# Altium PCB RPi Motor Driver Rev 0.2.PcbDoc
Units mm, origin at the board's own origin, x right, y up, seen from the top; angles counter-clockwise.
Board outline 65.25 x 56.75 mm, 2 copper layers (Top, Bottom); 42 components, 51 nets, 197 pads, 38 vias.
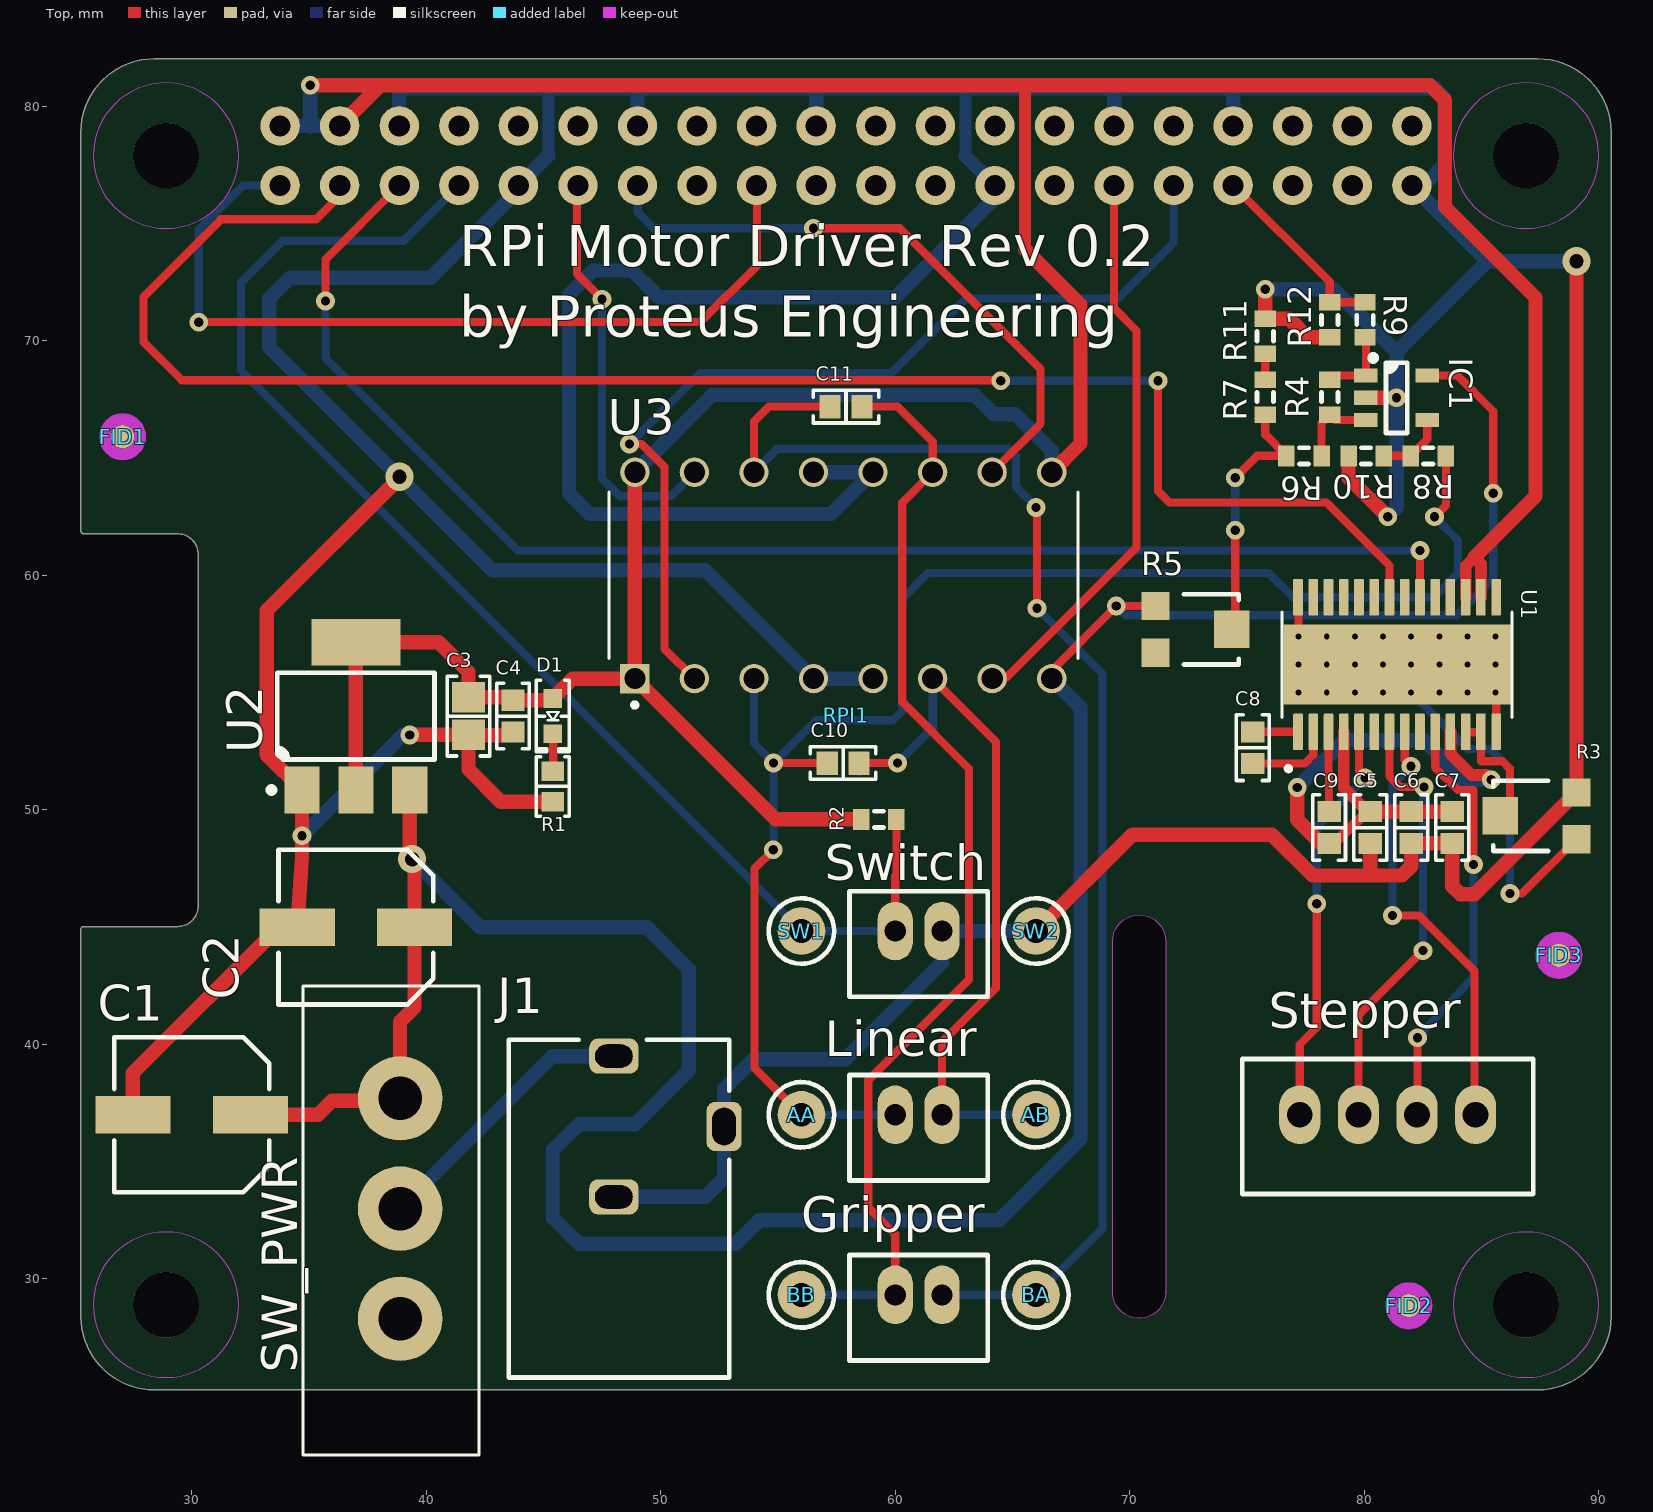
[diagram p0: Top view]
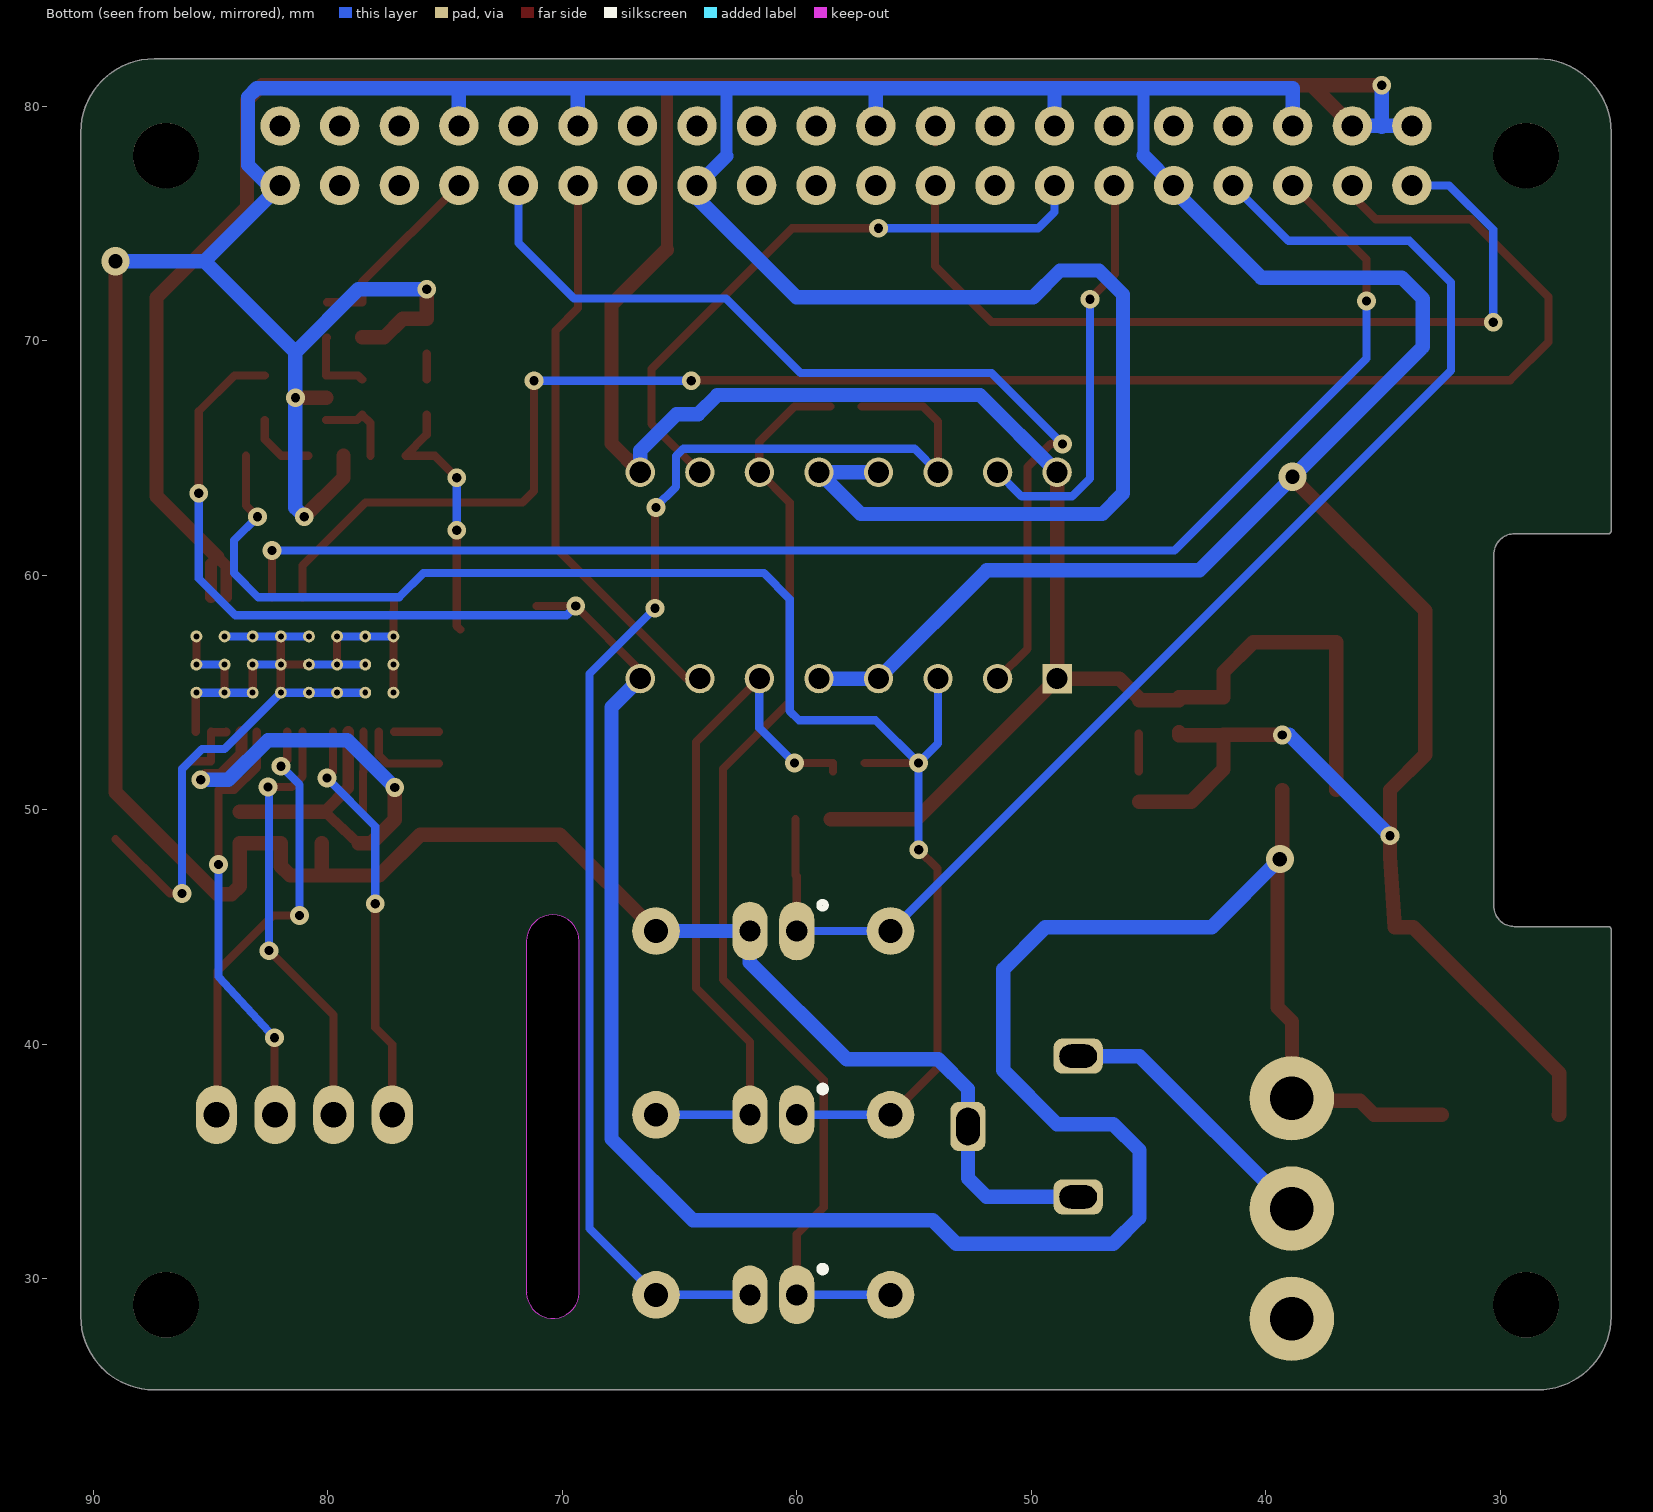
[diagram p1: Bottom view, seen from below]
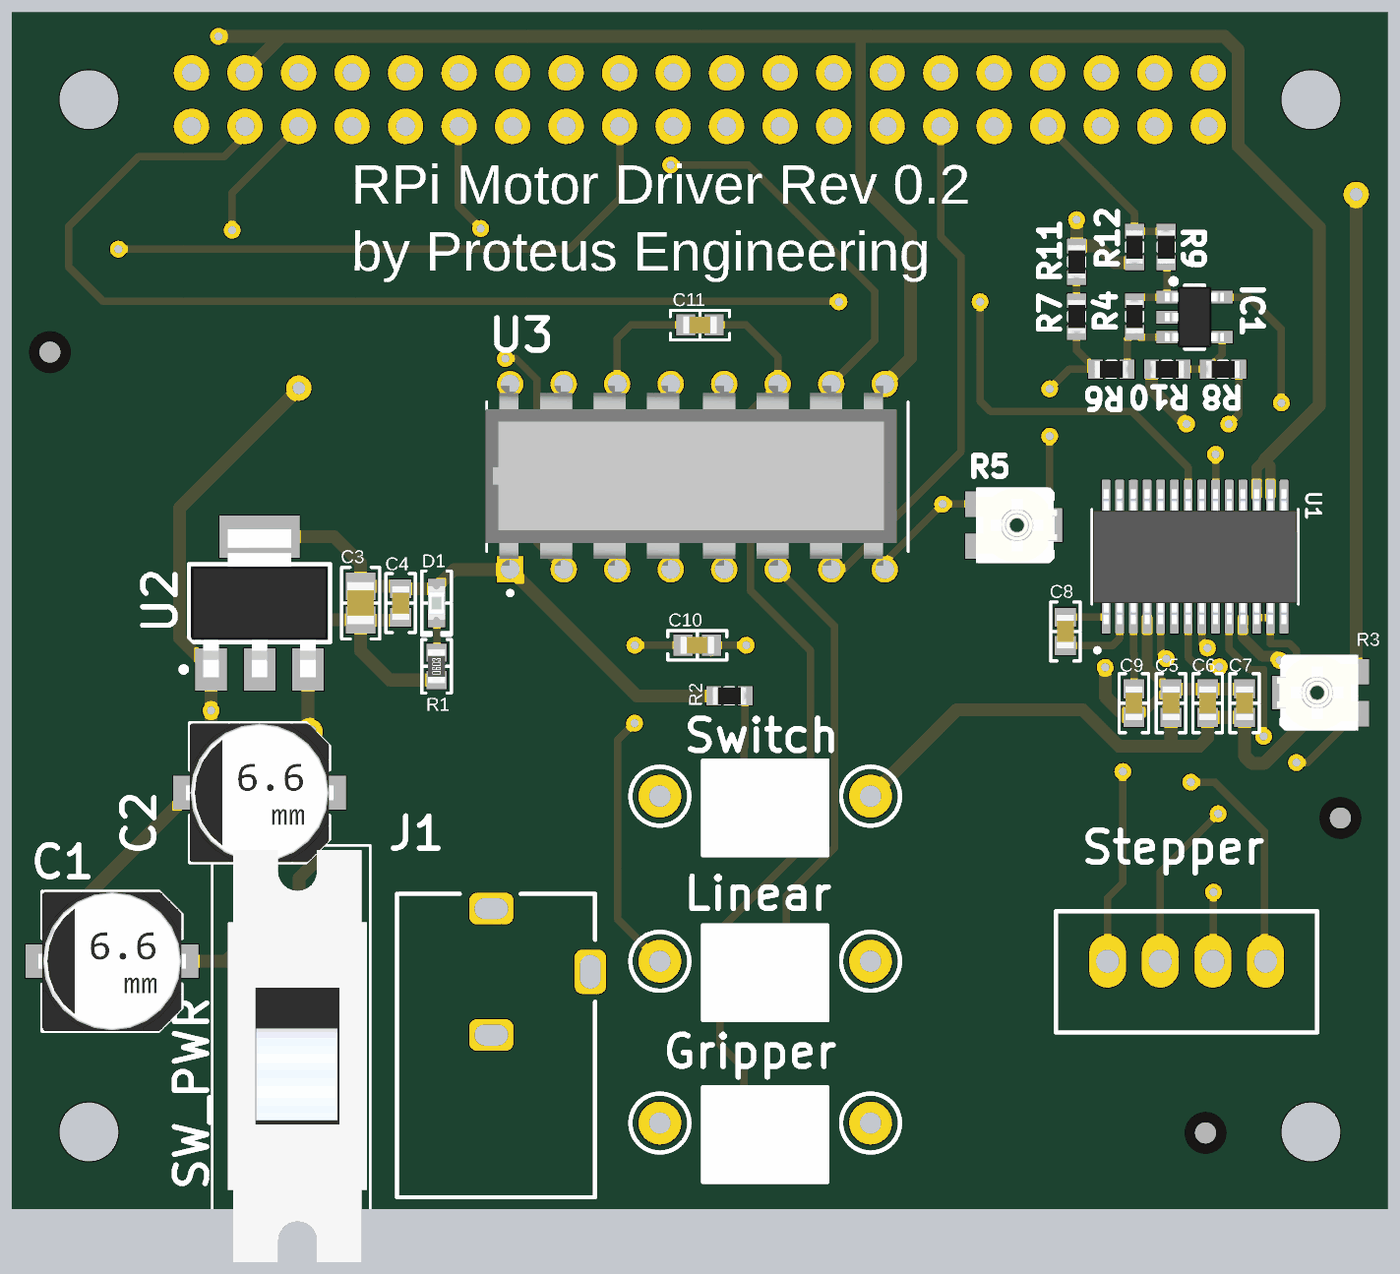
[diagram p2: 3D render of the assembled board from above, using the file's embedded part models]

## Layer stack, top to bottom
Top Solder: solder mask 0.0102, Solder Resist, Dk 3.5
Top: signal copper 0.035
Dielectric 1: dielectric 0.32, FR-4, Dk 4.8
Bottom: signal copper 0.035
Bottom Solder: solder mask 0.0102, Solder Resist, Dk 3.5

## Board outline
25.273,28.4 25.273,44.9 cw(c25.4,44.9) 25.401,45.027 29.4,45.027 ccw(c29.4,45.9) 30.273,45.9 30.273,60.9 ccw(c29.4,60.9) 29.4,61.773 25.4,61.773 cw(c25.4,61.9) 25.273,61.9 25.273,78.9 cw(c28.4,78.9) 28.4,82.027 87.4,82.027 cw(c87.4,78.9) 90.528,78.9 90.528,28.4 cw(c87.4,28.4) 87.4,25.273 28.4,25.273 cw(c28.4,28.4)
cut-out: 69.277,29.432 cw(c69.4,29.464) 69.273,29.464 69.273,44.4 cw(c70.4,44.4) 71.527,44.4 71.527,29.464 cw(c71.4,29.464) 71.523,29.432 cw(c71.4,29.4) 71.527,29.4 cw(c71.4,29.4) 71.527,29.394 cw(c70.4,29.449) 69.273,29.394 cw(c69.4,29.4)

## Design rules (kind name [scope] priority, off if disabled: settings)
Clearance "Clearance (Same Net)" [All] p1: gap=0.203 ignorepadtopadclearanceinfootprint=FALSE
Clearance [All] p2: gap=0.152 ignorepadtopadclearanceinfootprint=FALSE
ComponentClearance [All] p1 off: gap=0.254 collisioncheckmode=3 verticalgap=0.254 showdistances=FALSE
HoleSize [All] p1: absolutevalues=TRUE maxlimit=2540 minlimit=0.254 maxpercent=80.000 minpercent=20.000
HoleToHoleClearance mdDrill [All] p1: gap=0.203 allowstackedmicrovias=TRUE
PasteMaskExpansion Expansion_SMDPaste_OFF [InPadClass('SMDPaste_OFF')] p1: expansion=0
PasteMaskExpansion mlMinCreamFrame [All] p2: expansion=0
PolygonConnect ThermalVias [IsVia] p1: connectstyle=Direct reliefconductorwidth=0.254 reliefentries=4 polygonreliefangle="90 Angle" airgapwidth=0.254
PolygonConnect [All] p2: connectstyle=Relief reliefconductorwidth=0.254 reliefentries=4 polygonreliefangle="90 Angle" airgapwidth=0.254
RoutingVias [All] p1: holewidth=0.394 width=0.8 viastyle="Through Hole" minholewidth=0.394 minwidth=0.8 maxholewidth=2.54 maxwidth=2.54
SolderMaskExpansion mlMinStopFrame [All] p1: expansion=0.051
Width [All] p1: maxlimit=0.7 minlimit=0.35 preferedwidth=0.35
26 further rules are at their usual default settings.

## Classes and differential pairs
pad class SMDPaste_OFF: FID1-1 FID2-1

## Components (designator, comment, footprint, x,y, rotation, side; value= is the part's Value field where it differs from the comment)
AA "TH_Testpoint_40mil" TH_Testpoint_40mil 56,37 r0 top
AB "TH_Testpoint_40mil" TH_Testpoint_40mil 66,37 r0 top
BA "TH_Testpoint_40mil" TH_Testpoint_40mil 66,29.322 r0 top
BB "TH_Testpoint_40mil" TH_Testpoint_40mil 56,29.322 r0 top
C1 "47µF" "CAP ALSMD 6.6MM H6.1MM" 30,37 r180 top
C2 "47µF" "CAP ALSMD 6.6MM H6.1MM" 37,45 r180 top
C3 "10µF" "CAP 0805_2012" 41.8,54 r90 top
C4 "0.1µF" "CAP 0603_1608" 43.7,54 r90 top
C5 "4.7µF" "CAP 0603_1608" 80.26,49.25 r90 top
C6 "0.1µF" "CAP 0603_1608" 82,49.25 r90 top
C7 "0.1µF" "CAP 0603_1608" 83.753,49.25 r90 top
C8 "0.01µF" "CAP 0603_1608" 75.25,52.655 r90 top
C9 "0.1µF" "CAP 0603_1608" 78.5,49.25 r90 top
C10 "0.1µF" "CAP 0603_1608" 57.775,52 r180 top
C11 "0.1µF" "CAP 0603_1608" 57.9,67.2 r180 top
D1 "Green" "LED 0603_1608 GREEN" 45.4,54 r270 top
FID1 "FIDUCIAL\"\"" FIDUCIAL_1MM 27.051,65.913 r0 top
FID2 "FIDUCIAL\"\"" FIDUCIAL_1MM 81.9,28.853 r0 top
FID3 "FIDUCIAL\"\"" FIDUCIAL_1MM 88.3,43.8 r0 top
Gripper "B2B-PH-K-S(LF)(SN)" "JST B2B-PH-K" 61,29.322 r0 top
IC1 "AD8615AUJZ-REEL" "ANALOG TSOT-23-5 UJ-5" 81.38,67.575 r0 top
Linear "B2B-PH-K-S(LF)(SN)" "JST B2B-PH-K" 61,37 r0 top
R1 "100 Ohms" "RES 0603_1608" 45.4,51 r90 top
R2 "Resistor 0603" 0603R 59.3,49.6 r180 top value=100k
R3 "10 kOhms" "POT BOURNS TRIMPOT TC33" 87.25,49.75 r90 top
R4 "Resistor 0603" 0603R 78.53,67.6 r270 top value=50k
R5 "200 Ohms" "POT BOURNS TRIMPOT TC33" 72.9,57.7 r270 top
R6 "Resistor 0603" 0603R 77.43,65.1 r180 top value=1k
R7 "Resistor 0603" 0603R 75.78,67.6 r90 top value=200
R8 "Resistor 0603" 0603R 82.73,65.1 r0 top value=1k
R9 "Resistor 0603" 0603R 80.03,70.9 r270 top value=470k
R10 "Resistor 0603" 0603R 80.08,65.1 r0 top value=50k
R11 "Resistor 0603" 0603R 75.78,70.2 r90 top value=470
R12 "Resistor 0603" 0603R 78.53,70.9 r90 top value=200k
RPI1 "RASPBERRYPI_BPLUS_HATSLOTS" PI_HAT_SLOTS 25.4,25.4 r0 top
SW1 "TH_Testpoint_40mil" TH_Testpoint_40mil 56,44.835 r0 top
SW2 "TH_Testpoint_40mil" TH_Testpoint_40mil 66,44.835 r0 top
SW_PWR "48ASSP3S1M2QBT" "SWITCH SLIDE SPDT 5A 125V" 36,33 r270 top
Switch "B2B-PH-K-S(LF)(SN)" "JST B2B-PH-K" 61,44.835 r0 top
U1 "DRV8825PWP" SOP65P640X120-29N 81.4,56.2 r90 top
U2 "NCP1117ST50T3G" "ON SEMI SOT-223 ST(318H)" 37,54 r90 top
U3 "L293D" DIP880W50P254L2000H510Q16 57.785,60 r90 top

## Footprints (in the part's own frame and the unit in brackets; to place one, negate y for a bottom-side part, rotate by r counter-clockwise, add the part's x,y. Pads: shape width x height; smd on the part's side, far side on the other; paste and mask are expansions set on the pad)
0603R [mm] "Resistor"
  rect 0.7x0.9 smd: 1(-0.75,0) 2(0.75,0)
  silkscreen extent -0.2,-0.35 0.2,0.35, body extent -0.8,-0.4 0.8,0.4, height 0.45
"ANALOG TSOT-23-5 UJ-5" [mm] "SOT23, 5-Leads, Body 2.90x1.60mm, Pitch 0.95mm, IPC Medium Density"
  rect 1x0.6 smd: 1(-1.31,0.95) 2(-1.31,0) 3(-1.31,-0.95) 4(1.31,-0.95) 5(1.31,0.95)
  silkscreen extent -1.12,-1.5 0.45,1.82, body extent -1.4,-1.45 1.4,1.45, height 1
"CAP 0603_1608" [mm] "Chip Capacitor, 2-Leads, Body 1.60x0.80mm, IPC Medium Density"
  rect 0.9x1 smd: 1(-0.675,0) 2(0.675,0)
  silkscreen extent -1.4,-0.7 1.4,0.7, body extent -0.8,-0.41 0.8,0.41, height 0.82
"CAP 0805_2012" [mm] "Chip Capacitor, 2-Leads, Body 2.00x1.20mm, IPC Medium Density"
  rect 1.3x1.4 smd: 1(-0.8,0) 2(0.8,0)
  silkscreen extent -1.7,-0.9 1.7,0.9, body extent -1,-0.64 1,0.64, height 1.26
"CAP ALSMD 6.6MM H6.1MM" [mm] "Aluminum Electrolytic Capacitor, Body 6.60x6.60x6.10mm, IPC Low Density"
  rect 3.2x1.6 smd: 1(-2.5,0) 2(2.5,0)
  silkscreen extent -3.3,-3.3 3.3,3.3, body extent -3.5,-3.3 3.5,3.3, height 6.1
DIP880W50P254L2000H510Q16 [mm]
  rect 1.25x1.25 hole 0.9: 1(-4.4,8.89)
  round 1.25 hole 0.9: 2(-4.4,6.35) 3(-4.4,3.81) 4(-4.4,1.27) 5(-4.4,-1.27) 6(-4.4,-3.81) 7(-4.4,-6.35) 8(-4.4,-8.89) 9(4.4,-8.89) 10(4.4,-6.35) 11(4.4,-3.81) 12(4.4,-1.27) 13(4.4,1.27) 14(4.4,3.81) 15(4.4,6.35) 16(4.4,8.89)
  silkscreen extent -5.62,-10 3.55,10, body extent -4.23,-9.45 4.3,10.05, height 3.09
FIDUCIAL_1MM [mm] "FIDUCIAL_1MM"
  rrect100% 1x1 smd paste+0: 1(0,0)
  Top keep-out lines w0.5: -0.75,0 ccw(c0,0) 0,-0.75 ccw(c0,0) 0.75,0 ccw(c0,0) 0,0.75 ccw(c0,0) -0.75,0
"JST B2B-PH-K" [mm]
  oval 1.5x2.5 hole 0.9: 1(-1,0) 2(1,0)
  silkscreen extent -2.95,-2.8 2.95,1.7, body extent -2.95,-2.8 2.95,1.7, height 6
"LED 0603_1608 GREEN" [mm] "Chip Diode, 2-Leads, Body 1.60x0.80mm, IPC Medium Density"
  rect 0.8x0.8 smd: 1(-0.75,0) 2(0.75,0)
  silkscreen extent -1.52,-0.7 1.52,0.7, body extent -0.8,-0.4 0.8,0.4, height 0.53
"ON SEMI SOT-223 ST(318H)" [mm] "SOT223, 4-Leads, Body 6.50x7.00mm (avg), Pitch 2.30mm, IPC Medium Density"
  rect 2x1.5 smd: 1(-3.15,2.3) 2(-3.15,0) 3(-3.15,-2.3)
  rect 2x3.8 smd: 4(3.15,0)
  silkscreen extent -3.27,-3.35 1.85,3.72, body extent -3.52,-3.25 3.5,3.25, height 1.8
PI_HAT_SLOTS [mil] "PI_HAT_SLOTS"
  round 110.24 hole 110.24 unplated: 1(137.8,137.8) 1(137.8,2066.93) 1(2421.26,137.8) 1(2421.26,2066.93)
  round 66 / inner round 60 / far side round 66 hole 35.43: 1(329.53,2016.93) 2(329.53,2116.93) 3(429.53,2016.93) 4(429.53,2116.93) 5(529.53,2016.93) 6(529.53,2116.93) 7(629.53,2016.93) 8(629.53,2116.93) 9(729.53,2016.93) 10(729.53,2116.93) 11(829.53,2016.93) 12(829.53,2116.93) 13(929.53,2016.93) 14(929.53,2116.93) 15(1029.53,2016.93) 16(1029.53,2116.93) 17(1129.53,2016.93) 18(1129.53,2116.93) 19(1229.53,2016.93) 20(1229.53,2116.93) 21(1329.53,2016.93) 22(1329.53,2116.93) 23(1429.53,2016.93) 24(1429.53,2116.93) 25(1529.53,2016.93) 26(1529.53,2116.93) 27(1629.53,2016.93) 28(1629.53,2116.93) 29(1729.53,2016.93) 30(1729.53,2116.93) 31(1829.53,2016.93) 32(1829.53,2116.93) 33(1929.53,2016.93) 34(1929.53,2116.93) 35(2029.53,2016.93) 36(2029.53,2116.93) 37(2129.53,2016.93) 38(2129.53,2116.93) 39(2229.53,2016.93) 40(2229.53,2116.93)
  Top keep-out circle w0: c137.8,137.8 r122.05
  Top keep-out circle w0: c2421.26,137.8 r122.05
  Top keep-out circle w0: c137.8,2066.93 r122.05
  Top keep-out circle w0: c2421.26,2066.93 r122.05
"POT BOURNS TRIMPOT TC33" [mm] "Bourns Trimpot TC33X-1 - Open Frame 3mm x 3.8mm x 1.2mm"
  rect 1.2x1.2 smd: 1(-1,-1.8) 3(1,-1.8)
  rect 1.6x1.5 smd: 2(0,1.45)
  silkscreen extent -1.5,-0.6 1.5,1.75, body extent -1.8,-1.91 1.8,1.95, height 1.15
"RES 0603_1608" [mm] "Chip Resistor, 2-Leads, Body 1.60x0.80mm, IPC Medium Density"
  rect 0.85x0.95 smd: 1(-0.65,0) 2(0.65,0)
  silkscreen extent -1.27,-0.7 1.27,0.7, body extent -0.8,-0.4 0.8,0.4, height 0.45
SOP65P640X120-29N [mm]
  rrect25% 1.57x0.41 smd: 1(-2.87,4.225) 2(-2.87,3.575) 3(-2.87,2.925) 4(-2.87,2.275) 5(-2.87,1.625) 6(-2.87,0.975) 7(-2.87,0.325) 8(-2.87,-0.325) 9(-2.87,-0.975) 10(-2.87,-1.625) 11(-2.87,-2.275) 12(-2.87,-2.925) 13(-2.87,-3.575) 14(-2.87,-4.225) 15(2.87,-4.225) 16(2.87,-3.575) 17(2.87,-2.925) 18(2.87,-2.275) 19(2.87,-1.625) 20(2.87,-0.975) 21(2.87,-0.325) 22(2.87,0.325) 23(2.87,0.975) 24(2.87,1.625) 25(2.87,2.275) 26(2.87,2.925) 27(2.87,3.575) 28(2.87,4.225)
  rect 3.4x9.7 smd paste-6 mask+0: 29(0,0)
  round 0.508 hole 0.254: P1(-1.2,0.6) P2(0,0.6) P3(1.2,0.6) P4(-1.2,-0.6) P5(0,-0.6) P6(1.2,-0.6) P7(-1.2,-1.8) P8(0,-1.8) P9(1.2,-1.8) P16(-1.2,1.8) P17(0,1.8) P18(1.2,1.8)
  round 0.508 hole 0.254 mask+0: P10(-1.2,-3) P11(0,-3) P12(1.2,-3) P13(-1.2,-4.2) P14(0,-4.2) P15(1.2,-4.2) P19(-1.2,3) P20(0,3) P21(1.2,3) P22(-1.2,4.2) P23(0,4.2) P24(1.2,4.2)
  silkscreen extent -4.54,-4.9 2.25,4.9, body extent -3.2,-4.85 3.2,4.85, height 1.18
"SWITCH SLIDE SPDT 5A 125V" [mm]
  round 3.6 hole 1.85 paste+0 mask+0.102: 1(-4.7,2.885) 2(0,2.885) 3(4.7,2.885)
  silkscreen extent -9.5,-1.25 10.5,6.25, body extent -9.28,-0.5 10.28,6.1, height 11.41
TH_Testpoint_40mil [mil]
  round 80 hole 40 paste-40: 1(0,0)
  silkscreen extent -55,-55 55,55

## Part data
AA AB BA BB SW1 SW2: "TH Testpoint"
C1 C2: library part UCD1V470MCL1GS, "CAP ALUM 47UF 20% 35V SMD", Device Package="Radial, Can - SMD", Lifetime @ Temp.="2000 Hrs @ 105°C", Manufacturer=Nichicon, Operating Temperature="-55°C ~ 105°C", Part Number=EEE-FP1V470AP, Ratings=AEC-Q200, Ripple Current @ High Frequency="240mA @ 100kHz", Ripple Current @ Low Frequency="120mA @ 120Hz", Supplier Part Number 1=493-6426-1-ND, Tolerance=±20%, Voltage - Rated=35V, Applications=Automotive, Capacitance=47µF, ComponentLink1Description=Datasheet, ComponentLink1URL=http://nichicon-us.com/english/products/pdfs/e-ucd.pdf, ComponentLink2Description="DigiKey Link", ComponentLink2URL=http://digikey.com/product-detail/en/nichicon/UCD1V470MCL1GS/493-6426-1-ND/3438940, Height - Seated (Max)="0.240\" (6.10mm)", Impedance="360 mOhms", LastUpdated="1/21/2020 4:04:57 AM", Lifecycle Status=Active, Minimum Order=1, Mounting Type="Surface Mount", Package / Case="Radial, Can - SMD", Packaging=TapeAndReel, PartId=8038, Part Status=Active, Polarization=Polar, Price=0.13, Series=UCD, Size / Dimension="0.248\" Dia (6.30mm)", Supplier 1=DigiKey, Surface Mount Land Size="0.260\" L x 0.260\" W (6.60mm x 6.60mm)"
C3: library part C2012X5R1E106K085AC, "CAP CER 10UF 25V X5R 0805", Device Package="0805 (2012 Metric)", Manufacturer="TDK Corporation", Operating Temperature="-55°C ~ 85°C", Supplier Part Number 1=445-14387-1-ND, Temperature Coefficient=X5R, Tolerance=±10%, Voltage - Rated=25V, Applications="General Purpose", Capacitance=10µF, ComponentLink1Description=Datasheet, ComponentLink1URL=https://product.tdk.com/info/en/catalog/datasheets/mlcc_commercial_general_en.pdf?ref_disty=digikey, ComponentLink2Description="DigiKey Link", ComponentLink2URL=http://digikey.com/product-detail/en/tdk-corporation/C2012X5R1E106K085AC/445-14387-1-ND/3956053, Features="Low ESL", LastUpdated="1/21/2020 12:02:45 AM", Lifecycle Status=Active, Minimum Order=1, Mounting Type="Surface Mount, MLCC", Package / Case="0805 (2012 Metric)", Packaging=TapeAndReel, PartId=15274, Part Number=C2012X5R1E106K085AC, Part Status=Active, Price=0.15, Series=C, Size / Dimension="0.079\" L x 0.049\" W (2.00mm x 1.25mm)", Supplier 1=DigiKey, Thickness (Max)="0.039\" (1.00mm)"
C4 C6 C7 C9 C10 C11: library part CGA3E2X7R1H104K080AE, "CAP CER 0.1UF 50V X7R 0603", Device Package="0603 (1608 Metric)", Manufacturer="TDK Corporation", Operating Temperature="-55°C ~ 125°C", Ratings=AEC-Q200, Supplier Part Number 1=445-15957-1-ND, Temperature Coefficient=X7R, Tolerance=±10%, Voltage - Rated=50V, Applications="Automotive, Boardflex Sensitive", Capacitance=0.1µF, ComponentLink1Description=Datasheet, ComponentLink1URL=https://product.tdk.com/info/en/catalog/datasheets/mlcc_automotive_soft_en.pdf?ref_disty=digikey, ComponentLink2Description="DigiKey Link", ComponentLink2URL=http://digikey.com/product-detail/en/tdk-corporation/CGA3E2X7R1H104K080AE/445-15957-1-ND/4490665, Features="Soft Termination", LastUpdated="1/21/2020 12:02:09 AM", Lifecycle Status=Active, Minimum Order=1, Mounting Type="Surface Mount, MLCC", Package / Case="0603 (1608 Metric)", Packaging=TapeAndReel, PartId=2715, Part Number=CGA3E2X7R1H104K080AE, Part Status=Active, Price=0.02, Series=CGA, Size / Dimension="0.063\" L x 0.031\" W (1.60mm x 0.80mm)", Supplier 1=DigiKey, Thickness (Max)="0.035\" (0.90mm)"
C5: library part C1608X5R1V475M080AC, "CAP CER 4.7UF 35V X5R 0603", Device Package="0603 (1608 Metric)", Manufacturer="TDK Corporation", Operating Temperature="-55°C ~ 85°C", Supplier Part Number 1=445-9042-1-ND, Temperature Coefficient=X5R, Tolerance=±20%, Voltage - Rated=35V, Applications="General Purpose", Capacitance=4.7µF, ComponentLink1Description=Datasheet, ComponentLink1URL=https://product.tdk.com/info/en/catalog/datasheets/mlcc_commercial_general_en.pdf?ref_disty=digikey, ComponentLink2Description="DigiKey Link", ComponentLink2URL=http://digikey.com/product-detail/en/tdk-corporation/C1608X5R1V475M080AC/445-9042-1-ND/3648698, Features="Low ESL", LastUpdated="1/21/2020 12:02:09 AM", Lifecycle Status=Active, Minimum Order=1, Mounting Type="Surface Mount, MLCC", Package / Case="0603 (1608 Metric)", Packaging=TapeAndReel, PartId=2662, Part Number=C1608X5R1V475M080AC, Part Status=Active, Price=0.11, Series=C, Size / Dimension="0.063\" L x 0.031\" W (1.60mm x 0.80mm)", Supplier 1=DigiKey, Thickness (Max)="0.039\" (1.00mm)"
C8: library part C0603C103KARACAUTO, "CAP CER 0.01UF 250V X7R 0603", Device Package="0603 (1608 Metric)", Manufacturer=KEMET, Operating Temperature="-55°C ~ 125°C", Ratings=AEC-Q200, Supplier Part Number 1=399-17960-1-ND, Temperature Coefficient=X7R, Tolerance=±10%, Voltage - Rated=250V, Applications="Automotive, Bypass, Decoupling", Capacitance=0.01µF, ComponentLink1Description=Datasheet, ComponentLink1URL=https://api.kemet.com/component-edge/download/datasheet/C0603C103KARACAUTO.pdf, ComponentLink2Description="DigiKey Link", ComponentLink2URL=http://digikey.com/product-detail/en/kemet/C0603C103KARACAUTO/399-17960-1-ND/9084030, LastUpdated="1/21/2020 12:01:45 AM", Lifecycle Status=Active, Minimum Order=1, Mounting Type="Surface Mount, MLCC", Package / Case="0603 (1608 Metric)", Packaging=TapeAndReel, PartId=15195, Part Number=C0603C103KARACAUTO, Part Status=Active, Price=0.26, Series="SMD Auto X7R", Size / Dimension="0.063\" L x 0.031\" W (1.60mm x 0.80mm)", Supplier 1=DigiKey, Thickness (Max)="0.034\" (0.87mm)"
D1: library part APHD1608LCGCK, "LED GREEN CLEAR 1608 SMD", Current - Test=2mA, Device Package="0603 (1608 Metric)", Lens Color=Colorless, Manufacturer=Kingbright, Millicandela Rating=5mcd, Part Number=APT1608CGCK, Supplier Device Package=1608, Supplier Part Number 1=754-2031-1-ND, Voltage - Forward (Vf) (Typ)=1.9V, Color=Green, ComponentLink1Description=Datasheet, ComponentLink1URL=http://www.kingbrightusa.com/images/catalog/SPEC/APHD1608LCGCK.pdf, ComponentLink2Description="DigiKey Link", ComponentLink2URL=http://digikey.com/product-detail/en/kingbright/APHD1608LCGCK/754-2031-1-ND/7043085, Configuration=Standard, Height (Max)=0.75mm, LastUpdated="1/21/2020 3:12:15 AM", Lens Size="0.70mm Dia", Lens Style="Round with Domed Top", Lens Transparency=Clear, Lifecycle Status=Active, Minimum Order=1, Mounting Type="Surface Mount", Package / Case="0603 (1608 Metric)", Packaging=TapeAndReel, PartId=602, Part Status=Active, Price=0.10, Series=-, Size / Dimension="1.60mm L x 0.80mm W", Supplier 1=DigiKey, Viewing Angle=100°, Wavelength - Dominant=570nm, Wavelength - Peak=574nm
FID1 FID2 FID3: "Fiducial Alignment PointsVarious fiducial points for machine vision alignment.", BOM=EXCLUDE, DeviceName="\"\"", DeviceSetName=FIDUCIAL, GateName_1=G$1, LibraryName=microbuilder, SymbolName_1=FIDUCIAL
Gripper Linear Switch: "CONN HEADER VERT 2POS 2MM", Current Rating (Amps)=2A, Insulation Color=Natural, Manufacturer="JST Sales America Inc.", Material Flammability Rating="UL94 V-0", Operating Temperature="-25°C ~ 85°C", Supplier Part Number 1=455-1704-ND, Voltage Rating=100V, ComponentLink1Description=Datasheet, ComponentLink1URL=http://www.jst-mfg.com/product/pdf/eng/ePH.pdf, ComponentLink2Description="DigiKey Link", ComponentLink2URL=http://digikey.com/product-detail/en/jst-sales-america-inc/B2B-PH-K-S-LF-SN/455-1704-ND/926611, Connector Type=Header, Contact Finish - Mating=Tin, Contact Finish - Post=Tin, Contact Length - Mating="0.130\" (3.30mm)", Contact Length - Post="0.134\" (3.40mm)", Contact Material=Brass, Contact Shape=Square, Contact Type="Male Pin", Fastening Type="Detent Lock", Insulation Height="0.236\" (6.00mm)", Insulation Material="Polyamide (PA66), Nylon 6/6", LastUpdated="1/3/2020 11:40:58 PM", Lifecycle Status=Active, Minimum Order=1, Mounting Type="Through Hole", Number of Positions=2, Number of Positions Loaded=All, Number of Rows=1, Overall Contact Length="0.333\" (8.45mm)", Packaging=Bulk, PartId=11, Part Number=B2B-PH-K-S(LF)(SN), Part Status=Active, Pitch - Mating="0.079\" (2.00mm)", Price=0.17, Series=PH, Shrouding="Shrouded - 4 Wall", Style="Board to Cable/Wire", Supplier 1=DigiKey, Termination="Press-Fit, Solder"
IC1: "IC OPAMP GP 1 CIRCUIT TSOT23-5", Current - Input Bias=0.2pA, Current - Output / Channel=150mA, Current - Supply=1.7mA, Device Package="SOT-23-5 Thin, TSOT-23-5", Manufacturer="Analog Devices Inc.", Operating Temperature="-40°C ~ 125°C", Supplier Device Package=TSOT-23-5, Supplier Part Number 1=AD8615AUJZ-REELTR-ND, Voltage - Input Offset=23µV, Voltage - Supply, Single/Dual (±)="2.7V ~ 5.5V, ±1.35V ~ 2.75V", Amplifier Type="General Purpose", ComponentLink1Description=Datasheet, ComponentLink1URL=https://www.analog.com/media/en/technical-documentation/data-sheets/AD8615_8616_8618.pdf, ComponentLink2Description="DigiKey Link", ComponentLink2URL=//digikey.com/product-detail/en/analog-devices-inc/AD8615AUJZ-REEL/AD8615AUJZ-REELTR-ND/993826, Gain Bandwidth Product=24MHz, LastUpdated="12/9/2019 2:06:44 AM", Lifecycle Status=0, Minimum Order=1, Mounting Type="Surface Mount", Number of Circuits=1, Output Type=Rail-to-Rail, Package / Case="SOT-23-5 Thin, TSOT-23-5", Packaging=TapeAndReel, PartId=5, Part Number=AD8615AUJZ-REEL, Part Status=Active, Price=1.06, Series=DigiTrim®, Slew Rate=12V/µs, Supplier 1=DigiKey
R1: library part RNCS0603BKE100R, "RES 100 OHM 0.1% 1/16W 0603", Device Package="0603 (1608 Metric)", Manufacturer="Stackpole Electronics Inc", Operating Temperature="-55°C ~ 155°C", Power (Watts)="0.063W, 1/16W", Ratings=AEC-Q200, Supplier Device Package=0603, Supplier Part Number 1=RNCS0603BKE100RCT-ND, Temperature Coefficient=±25ppm/°C, Tolerance=±0.1%, ComponentLink1Description=Datasheet, ComponentLink1URL=https://www.seielect.com/catalog/sei-rncs_rnch.pdf, ComponentLink2Description="DigiKey Link", ComponentLink2URL=http://digikey.com/product-detail/en/stackpole-electronics-inc/RNCS0603BKE100R/RNCS0603BKE100RCT-ND/1800117, Composition="Thin Film", Features="Anti-Corrosive, Automotive AEC-Q200, Moisture Resistant", Height - Seated (Max)="0.022\" (0.55mm)", LastUpdated="1/21/2020 12:25:01 AM", Lifecycle Status=Active, Minimum Order=1, Number of Terminations=2, Package / Case="0603 (1608 Metric)", Packaging=TapeAndReel, PartId=4839, Part Number=RNCS0603BKE100R, Part Status=Active, Price=0.08, Resistance="100 Ohms", Series=RNCS, Size / Dimension="0.061\" L x 0.031\" W (1.55mm x 0.80mm)", Supplier 1=DigiKey
R2 R4 R6 R7 R8 R9 R10 R11 R12: library part Resistor, Size=0603R
R3: library part TC33X-2-103E, "TRIMMER 10K OHM 0.1W J LEAD TOP", Manufacturer="Bourns Inc.", Power (Watts)="0.1W, 1/10W", Resistive Material=Cermet, Supplier Part Number 1=TC33X-103ECT-ND, Temperature Coefficient=±250ppm/°C, Tolerance=±25%, Adjustment Type="Top Adjustment", ComponentLink1Description=Datasheet, ComponentLink1URL=https://www.bourns.com/docs/Product-Datasheets/TC33.pdf, ComponentLink2Description="DigiKey Link", ComponentLink2URL=http://digikey.com/product-detail/en/bourns-inc/TC33X-2-103E/TC33X-103ECT-ND/612911, LastUpdated="1/21/2020 3:20:18 AM", Lifecycle Status=Active, Minimum Order=1, Mounting Type="Surface Mount", Number of Turns=1, Packaging=TapeAndReel, PartId=8, Part Number=TC33X-2-103E, Part Status=Active, Price=0.15, Resistance="10 kOhms", Series="Trimpot® TC33 - Open Frame", Size / Dimension="Rectangular - 0.150\" x 0.142\" Face x 0.047\" H (3.80mm x 3.60mm x 1.20mm)", Supplier 1=DigiKey, Termination Style="J Lead"
R5: library part TC33X-2-201E, "TRIMMER 200 OHM 0.1W J LEAD TOP", Manufacturer="Bourns Inc.", Power (Watts)="0.1W, 1/10W", Resistive Material=Cermet, Supplier Part Number 1=TC33X-2-201ECT-ND, Temperature Coefficient=±250ppm/°C, Tolerance=±25%, Adjustment Type="Top Adjustment", ComponentLink1Description=Datasheet, ComponentLink1URL=https://www.bourns.com/docs/Product-Datasheets/TC33.pdf, ComponentLink2Description="DigiKey Link", ComponentLink2URL=http://digikey.com/product-detail/en/bourns-inc/TC33X-2-201E/TC33X-2-201ECT-ND/3437928, LastUpdated="8/13/2020 10:53:13 AM", Lifecycle Status=Active, Minimum Order=1, Mounting Type="Surface Mount", Number of Turns=1, Packaging=TapeAndReel, PartId=3, Part Number=TC33X-2-201E, Part Status=Active, Price=0.15, Resistance="200 Ohms", Series="Trimpot® TC33 - Open Frame", Size / Dimension="Rectangular - 0.150\" x 0.142\" Face x 0.047\" H (3.80mm x 3.60mm x 1.20mm)", Supplier 1=DigiKey, Termination Style="J Lead"
SW_PWR: library part "SWITCH SLIDE SPDT 5A 125V", "SWITCH SLIDE SPDT 5A 125V", Mfg PN=48ASSP3S1M2QBT
U1: "Bipolar Motor Driver Power MOSFET Logic 28-HTSSOP", Package="HTSSOP-28 Texas Instruments", Availability=Unavailable, MF="Texas Instruments", MP=DRV8825PWP, Price=None, SnapEDA_Link=https://www.snapeda.com/parts/DRV8825PWP/Texas%20Instruments/view-part/52585/?ref=snap
U2: "IC REG LINEAR 5V 1A SOT223", Current - Output=1A, Current - Quiescent (Iq)=10mA, Device Package="TO-261-4, TO-261AA", Manufacturer="ON Semiconductor", Operating Temperature="0°C ~ 125°C", Supplier Device Package=SOT-223, Supplier Part Number 1=NCP1117ST50T3GOSCT-ND, Voltage - Input (Max)=20V, Voltage - Output (Min/Fixed)=5V, Voltage Dropout (Max)="1.2V @ 800mA", ComponentLink1Description=Datasheet, ComponentLink1URL=https://www.onsemi.com/pub/Collateral/NCP1117-D.PDF, ComponentLink2Description="DigiKey Link", ComponentLink2URL=http://digikey.com/product-detail/en/on-semiconductor/NCP1117ST50T3G/NCP1117ST50T3GOSCT-ND/1967217, LastUpdated="1/21/2020 3:56:44 AM", Lifecycle Status=Active, Minimum Order=1, Mounting Type="Surface Mount", Number of Regulators=1, Output Configuration=Positive, Output Type=Fixed, Package / Case="TO-261-4, TO-261AA", Packaging=TapeAndReel, Part Number=NCP1117ST50T3G, Part Status=Active, Price=0.16, Protection Features="Over Current, Over Temperature", PSRR="61dB (120Hz)", Series=-, Supplier 1=DigiKey
U3: "Bipolar Motor Driver Parallel 16-PowerDIP", Package="SOIC-20 STMicroelectronics", Availability=Unavailable, MF=STMicroelectronics, Mfg PN=L293D, Price=None, SnapEDA_Link=https://www.snapeda.com/parts/L293D/STMicroelectronics/view-part/83726/?ref=snap
RPI1: DeviceName=_HATSLOTS, DeviceSetName=RASPBERRYPI_BPLUS, GateName_1=G$1, LibraryName=microbuilder, RaspberryPiModelB+="Raspberry Pi Model B+", SymbolName_1=RASPBERRYPI_BPLUS

## Free pads (board coordinates)
  rrect50% 2.1x1.5 hole 1 slot 1.6 at 0 deg: 1(48,39.5) 2(48,33.5)
  oval 1.75x2.5 hole 1.1: 1(77.25,37) 2(79.75,37) 3(82.25,37) 4(84.75,37)
  rrect50% 1.5x2.1 hole 1 slot 1.6 at 90 deg: 3(52.7,36.5)

## Via types
v1: diameter 0.8, hole 0.394, Top to Bottom, 35 vias
v2: diameter 1.2, hole 0.61, Top to Bottom, 2 vias
v3: diameter 1.2, hole 0.6, Top to Bottom, 1 vias

## Nets (pads, with @x,y where several pads share a name; then routed paths per layer and width w, separated by ;. In a path a pad name is that pad's centre, name@x,y a point inside that pad or via, vN(x,y) a via of type N, cw(c..) or ccw(c..) an arc to the next point about the centre after c; other vN are vias at no path point)
5V: C3.2 C4.2 D1.1 R2.2 RPI1.2 RPI1.4 U1.16 U1.17 U2.2 U2.4 U3.1 U3.9 U3.16 | length 161.7
  Top w0.5: 65.532,73.889 65.532,80.899 ; U1.17 84.325,60.403 84.7,60.778 84.975,60.503 U1.16
  Top w0.61: v1(35.052,80.899) 38.039,80.899 ; RPI1.4 38.039,80.899 ; U2.2 37,53.975 U2.4 40.53,57.15 41.8,55.88 C3.2 43.7,54.8 C4.2 45.4,54.675 D1.1 46.25,55.6 U3.1 ; U3.16 U3.1 ; R2.2 54.895,49.6 U3.1 ; 65.532,73.889 65.557,73.889 67.9,71.546 67.9,65.625 U3.9 ; 65.557,80.9 65.532,80.899 ; 84.7,60.778 87.3,63.378 87.3,71.847 83.439,75.708 83.439,80.264 82.804,80.899 65.532,80.899 ; 38.039,80.899 65.532,80.899
  Bottom w0.61: RPI1.2 35.052,79.17 ; v1(35.052,80.899) 35.052,79.17 ; RPI1.4 35.099,79.17 ; U3.16 52.186,67.691 63.384,67.691 64.207,66.868 65.132,66.868 66.675,65.325 U3.9 ; 35.052,79.17 35.052,79.123 35.099,79.17 ; 35.052,79.17 35.099,79.17
12V: C1.1 C2.1 IC1.5 R5.1 SW_PWR.1 U2.3 U3.8 | length 126.4
  Top w0.35: U3.8@66.675,55.951 v1(69.424,58.7) R5.1 ; IC1.5 83.975,68.525 85.5,67 v1(85.5,63.5)
  Top w0.61: C1.1 35.382,37 35.982,37.6 38.885,37.6 38.885,40.97 39.5,41.585 C2.1 39.5,47.803 39.3,48.003 U2.3
  Bottom w0.35: v1(69.424,58.7) 69.824,58.3 83.93,58.3 85.5,59.87 v1(85.5,63.5)
  Bottom w0.61: v2(39.4,47.903) 42.303,45 49.4,45 51.2,43.2 51.2,38.9 48.9,36.6 46.5,36.6 45.385,35.485 45.385,32.615 46.5,31.5 53.2,31.5 54.2,32.5 64.428,32.5 67.9,35.972 67.9,54.375 U3.8
A1: pad.1@77.25,37 U1.5 | length 17.6
  Top w0.35: pad.1@77.25,37 77.25,40 77.975,40.725 v1(77.975,46.004) ; U1.5 79.775,51.619 v1(80.035,51.359)
  Bottom w0.35: v1(77.975,46.004) 77.975,49.298 v1(80.035,51.359)
A2: pad.2@79.75,37 U1.7 | length 19.8
  Top w0.35: pad.2@79.975,36 79.75,36.225 79.75,37 79.75,41.25 v1(82.5,44) ; U1.7 81.075,51.435 81.532,50.978 v1(82.55,50.978)
  Bottom w0.35: v1(82.5,44) 82.5,50.928 v1(82.55,50.978)
B1: pad.3@82.25,37 U1.10 | length 18.3
  Top w0.35: pad.3@82.275,37 v1(82.275,40.283) ; U1.10 83.025,51.816 83.991,50.85 84.658,50.85 v1(84.658,47.676)
  Bottom w0.35: v1(82.275,40.283) 84.658,42.891 v1(84.658,47.676)
B2: pad.4 U1.8 | length 18.9
  Top w0.35: v1(81.2,45.5) 82.338,45.5 84.7,43.138 pad.4@84.7,37 ; U1.8 81.725,52.133 v1(81.991,51.867)
  Bottom w0.35: v1(81.2,45.5) 81.2,51.076 v1(81.991,51.867)
EECLK: RPI1.28 | length 0.2
  Top w0.35: RPI1.28@66.79,79.006 RPI1.28
EEDATA: RPI1.27
GND: C1.2 C2.2 C3.1 C4.1 C5.1 C6.1 C7.1 IC1.2 pad.2@48,33.5 pad.3@52.7,36.5 R1.1 R3.3 R10.1 R11.2 R12.1 RPI1.6 RPI1.9 RPI1.14 RPI1.20 RPI1.25 RPI1.30 RPI1.34 RPI1.39 SW2.1 Switch.2 U2.1 U3.4 U3.5 U3.12 U3.13 | length 327.2
  Top w0.61: C1.2 27.483,37 27.483,38.777 33.706,45 C2.2 34.7,48.003 U2.1 33.2,52.35 33.2,58.5 v3@38.887,64.187 ; v1@39.281,53.2 C3.1 C3.1@41.8,53.188 ; C4.1 43.7,53.188 C3.1@41.8,53.188 ; R1.1 43.18,50.35 41.8,51.73 C3.1@41.8,53.188 ; SW2.1 70.111,48.946 76.054,48.946 77.8,47.2 80.3,47.2 ; RPI1.34@74.41,78.752 RPI1.34 ; v1(75.78,72.2) R11.2 76.8,70.95 77.6,70.15 R12.1 ; R10.1 79.33,64.17 v1(81,62.5) ; IC1.2 v1(81.38,67.575) ; C5.1 80.26,47.24 80.3,47.2 ; v2(89.05,73.4) R3.3 84.7,46.4 84.1,46.4 83.753,46.747 C7.1 C6.1 82,47.6 81.6,47.2 80.3,47.2
  Bottom w0.35: 33.3,69.748 33.4,69.648
  Bottom w0.5: 45.212,77.912 45.212,80.645 ; 62.992,77.888 62.992,80.772
  Bottom w0.61: 33.3,69.748 33.3,71.8 34.2,72.7 40.188,72.7 43.93,76.442 RPI1.9 45.212,77.912 ; 33.4,69.648 42.824,60.223 51.892,60.223 U3.4 U3.5 ; v1(34.7,48.9) 39,53.2 v1(39.3,53.2) ; RPI1.6 38.85,80.772 45.339,80.772 ; 45.212,80.645 45.339,80.772 ; pad.2@48,33.5 51.91,33.5 52.7,34.29 52.7,36.5 52.7,38.1 53.97,39.37 57.872,39.37 62,43.497 Switch.2 63.983,44.835 SW2.1 ; RPI1.14 49.01,80.772 ; U3.13 U3.12 57.273,62.618 46.967,62.618 46.085,63.5 46.085,71.977 47.107,73 48.776,73 49.919,71.857 60.009,71.857 64.516,76.364 RPI1.25 62.992,77.888 ; RPI1.20 56.63,80.772 ; RPI1.30 69.342,79.17 69.342,80.772 ; RPI1.34 74.41,80.772 ; v1(75.78,72.2) 78.7,72.2 81.38,69.52 ; v1(81,62.5) 81.38,62.88 v1(81.38,67.575) 81.38,69.52 ; v2(89.05,73.4) 85.26,73.4 ; 45.339,80.772 49.01,80.772 ; 49.01,80.772 56.63,80.772 ; 56.63,80.772 62.992,80.772 69.342,80.772 ; 69.342,80.772 74.41,80.772 ; 74.41,80.772 83.028,80.772 83.4,80.4 83.4,77.5 82.53,76.63 RPI1.39 85.26,73.4 ; 81.38,69.52 85.26,73.4
  other v3: 38.866,64.208
GPIO12: RPI1.32
GPIO16: RPI1.36 | length 0.3
  Bottom w0.35: RPI1.36@76.95,78.855 RPI1.36
GPIO18: RPI1.12 | length 0.4
  Bottom w0.35: RPI1.12@46.47,78.728 RPI1.12
GPIO19: RPI1.35
GPIO20: RPI1.38
GPIO21: RPI1.40 | length 0.1
  Bottom w0.35: RPI1.40 RPI1.40@82.079,79.121
GPIO22: RPI1.15
GPIO23: RPI1.16 | length 0.3
  Bottom w0.35: RPI1.16@51.55,78.855 RPI1.16
GPIO24: RPI1.18 | length 0.7
  Top w0.35: RPI1.18@54.09,78.474 RPI1.18
GPIO25: RPI1.22 | length 0.1
  Top w0.35: RPI1.22@59.104,79.17 RPI1.22
GPIO26: RPI1.37
GRIPPER_COMPRESS: RPI1.11 U3.15 | length 17.7
  Top w0.35: RPI1.11 46.43,76.63 46.43,72.848 v1(47.498,71.78)
  Bottom w0.35: v1(47.498,71.78) 47.498,64.135 48.26,63.373 50.408,63.373 U3.15
GRIPPER_DECOMPRESS: RPI1.13 U3.10 | length 26.4
  Top w0.35: v1(56.515,74.8) 60.2,74.8 66.2,68.8 66.2,66.465 U3.10
  Bottom w0.35: RPI1.13 49.01,75.5 49.71,74.8 v1(56.515,74.8)
LINEAR_DRIVE_BACK: RPI1.31 U3.2 | length 40.7
  Top w0.35: v1(48.666,65.608) 49.174,65.608 50.165,64.618 50.165,56.87 U3.2
  Bottom w0.35: v1(48.666,65.608) 51.689,68.631 59.842,68.631 63.017,71.806 69.496,71.806 71.87,74.18 RPI1.31
LINEAR_DRIVE_FWD: RPI1.29 U3.7 | length 24.3
  Top w0.35: U3.7 64.7,55.6 70.293,61.193 70.293,70.434 69.33,71.398 RPI1.29
MOTOR_AA: AA.1 C10.2 Linear.1 R8.2 U3.3 | length 68.2
  Top w0.35: v1(54.8,48.3) 54,47.5 54,39 AA.1 ; v1(54.813,52) C10.2 ; v1(83,62.5) 83.48,62.98 R8.2
  Bottom w0.35: U3.3 53.975,52.838 v1(54.813,52) ; v1(54.8,48.3) 54.813,48.313 v1(54.813,52) ; AA.1 Linear.1 ; v1(83,62.5) 84,61.5 84,60.105 82.965,59.07 76.955,59.07 75.925,60.1 61.4,60.1 60.3,59 60.3,54.225 59.9,53.825 56.638,53.825 v1(54.813,52)
MOTOR_AB: AB.1 C10.1 Linear.2 U3.6 | length 31.4
  Top w0.35: C10.1@58.45,51.643 C10.1 v1(60.1,52) ; U3.6 64.3,52.895 64.3,42.4 62,40.1 Linear.2 Linear.2@62,36.5
  Bottom w0.35: v1(60.1,52) 61.595,53.495 U3.6 ; Linear.2 AB.1
MOTOR_BA: BA.1 C11.2 Gripper.2 U3.14 | length 59.9
  Top w0.35: U3.14 53.975,66.565 54.61,67.2 C11.2 ; v1(66,62.9) 66.04,62.86 v1(66.04,58.6)
  Bottom w0.35: U3.14 54.98,65.405 64.834,65.405 65.151,65.087 65.151,63.779 v1@66.04,62.89 ; Gripper.2 63.983,29.322 BA.1 68.834,32.156 68.834,55.806 v1(66.04,58.6)
MOTOR_BB: BB.1 C11.1 Gripper.1 U3.11 | length 48
  Top w0.35: C11.1 60.096,67.2 61.595,65.701 U3.11 60.3,63.105 60.3,54.6 63.144,51.756 63.144,42.774 58.852,38.481 58.852,33.051 60,31.902 Gripper.1
  Bottom w0.35: BB.1 57.988,29.322 Gripper.1
MOTOR_DIR: RPI1.5 U1.20 | length 60.7
  Top w0.35: v1(35.7,71.7) 35.7,73.48 RPI1.5 ; U1.20 v1(82.375,61.062)
  Bottom w0.35: v1(35.7,71.7) 35.7,69.253 43.891,61.062 v1(82.375,61.062)
MOTOR_STEP: RPI1.3 U1.22 | length 73.7
  Top w0.35: RPI1.3 36.31,76.188 35.306,75.184 31.242,75.184 27.94,71.882 27.94,69.96 29.574,68.326 v1@64.5,68.326 ; v1(71.2,68.303) 71.2,63.6 71.695,63.105 78.395,63.105 81.075,60.425 U1.22
  Bottom w0.35: v1(64.5,68.3) 71.197,68.3 v1(71.2,68.303)
NetC8_1: C8.1 U1.2 | length 3.7
  Top w0.35: C8.1 77.47,51.98 77.825,52.335 U1.2
NetC8_2: C8.2 U1.1 | length 1.9
  Top w0.35: C8.2 U1.1
NetC9_2: C9.2 U1.3 | length 3.4
  Top w0.35: U1.3 78.475,51.638 78.5,51.613 C9.2
NetD1_2: D1.2 R1.2 | length 1.6
  Top w0.35: R1.2 45.415,51.65 45.415,53.25 D1.2
NetIC1_1: IC1.1 R4.1 R9.2 | length 3.3
  Top w0.35: R4.1 78.705,68.525 IC1.1 80.07,70.11 R9.2
NetIC1_3: IC1.3 R4.2 R6.1 | length 3.5
  Top w0.35: R6.1 78.18,66.5 R4.2 78.755,66.625 IC1.3
NetIC1_4: IC1.4 R8.1 R10.2 | length 3
  Top w0.35: R10.2 R8.1 82.69,65.81 IC1.4
NetJ1_1: pad.1@48,39.5 SW_PWR.2 | length 11.8
  Bottom w0.61: SW_PWR.2 45.385,39.5 pad.1@48,39.5
NetR3_1: R3.1 U1.14 U1.28 U1.29 U1.P1 U1.P2 U1.P3 U1.P4 U1.P5 U1.P6 U1.P7 U1.P8 U1.P9 U1.P10 U1.P11 U1.P12 U1.P13 U1.P14 U1.P15 U1.P16 U1.P17 U1.P18 U1.P19 U1.P20 U1.P21 U1.P22 U1.P23 U1.P24 | length 45.7
  Top w0.35: U1.28 77.175,58.496 77.2,58.496 U1.P24 U1.P23 U1.P22 ; U1.P17 U1.P18 ; U1.P2 U1.29 U1.P5 ; U1.P4 U1.P5 ; U1.P6 U1.P5 ; U1.P7 83.2,55.575 U1.P8 ; U1.P10 U1.P11 ; U1.P13 85.625,54.975 U1.14 ; U1.P14 85.6,56.794 U1.P15 ; v1(86.215,46.431) 86.731,46.431 R3.1
  Bottom w0.35: U1.P24 U1.P21 U1.P18 ; U1.P19 U1.P16 U1.P1 U1.P4 84.4,52.6 85.367,52.6 86.215,51.752 v1(86.215,46.431) ; U1.P20 U1.P17 U1.P2 ; U1.P3 U1.P6 U1.P9 U1.P12 ; U1.P5 U1.P8 ; U1.P7 U1.P10 U1.P13 ; U1.P11 U1.P14
NetR5_2: R5.2 R6.2 R7.1 | length 11.2
  Top w0.35: R5.2 74.5,57.85 v1(74.5,61.925) ; v1(74.5,64.17) 75.43,65.1 R6.2 75.78,66 R7.1
  Bottom w0.35: v1(74.5,61.925) v1(74.5,64.17)
NetR7_2: R7.2 R11.1 | length 1.1
  Top w0.35: R7.2 R11.1
NetRPI1_1: RPI1.1@33.77,76.63 RPI1.17 | length 36.4
  Top w0.35: v1@30.3,70.804 51.704,70.804 54.1,73.2 54.1,76.62 RPI1.17
  Bottom w0.35: v1(30.3,70.8) 30.3,74.75 32.18,76.63 RPI1.1@33.77,76.63
SPI_CE0: RPI1.24 | length 0.3
  Top w0.35: RPI1.24@61.71,78.879 RPI1.24
SPI_CE1: RPI1.26 | length 0.2
  Bottom w0.35: RPI1.26@64.25,79.006 RPI1.26
SPI_MISO: RPI1.21
SPI_MOSI: RPI1.19
SPI_SCLK: RPI1.23
STALL_SIGNAL: R9.1 R12.2 RPI1.33 | length 8.3
  Top w0.35: RPI1.33 78.53,72.51 R12.2 R9.1
  Bottom w0.35: RPI1.33 RPI1.33@74.5,76.63
SWITCH_IN: R2.1 RPI1.7 SW1.1 Switch.1 | length 57.8
  Top w0.35: RPI1.7@41.39,76.188 RPI1.7 ; Switch.1 60,47.168 60.05,47.218 R2.1
  Bottom w0.35: RPI1.7 39.03,74.27 33.87,74.27 32.1,72.5 32.1,68.735 SW1.1 57.988,44.835 Switch.1
VMM: C5.2 C6.2 C7.2 C9.1 U1.4 U1.11 | length 25.7
  Top w0.45: C9.1@78.689,48.575 C5.2@80.137,49.925
  Top w0.5: U1.4 79.125,50.937 C5.2@80.137,49.925 ; U1.11 83.675,52.393 84.582,51.486 85.217,51.486 v1(85.42,51.283)
  Top w0.61: v1(77.14,50.952) 77.14,49.579 78.144,48.575 C9.1 C9.1@78.689,48.575 ; C5.2@80.137,49.925 C5.2 C6.2 C7.2
  Bottom w0.61: v1(77.14,50.952) 79.162,52.975 82.547,52.975 84.239,51.283 v1(85.42,51.283)
VREF: R3.2 U1.12 U1.13 | length 4.9
  Top w0.35: U1.12 84.325,53.315 U1.13@84.975,53.315 ; U1.13 U1.13@84.975,53.315 ; R3.2@86.215,50.1 86.215,51.752 85.892,52.075 84.975,52.075 U1.13@84.975,53.315
pads on no net: FID1.1 FID2.1 FID3.1 R5.3 RPI1.1@28.9,28.9 RPI1.1@28.9,77.9 RPI1.1@86.9,28.9 RPI1.1@86.9,77.9 RPI1.8 RPI1.10 SW_PWR.3 U1.6 U1.9 U1.15 U1.18 U1.19 U1.21 U1.23 U1.24 U1.25 U1.26 U1.27

## Silkscreen, mask and mechanical layers (free items; w line width, h text height)
Top Overlay:
  lines w0.2: 46.5,40.2 43.525,40.2 43.525,39.525 43.525,25.8 52.925,25.8 52.925,35.075 ; 49.4,40.2 52.925,40.2 52.925,38.025 ; 74.8,33.625 87.2,33.625 87.2,39.375 74.8,39.375 74.8,33.625
  text "RPi Motor Driver Rev 0.2 / by Proteus Engineering" at 41.4,69.6 h3
  text "J1" at 43.025,41.325 h1.52
  text "Stepper" at 75.925,40.7 h1.52
Dimension:
  lines w0.254: 69.4,29.4 ccw(c70.4,29.449) 71.4,29.4 ; 69.4,29.464 69.4,44.4 cw(c70.4,44.4) 71.4,44.4 71.4,29.464 ; 90.4,28.4 cw(c87.4,28.4) 87.4,25.4 28.4,25.4 cw(c28.4,28.4) 25.4,28.4 25.4,44.9 29.4,44.9 ccw(c29.4,45.9) 30.4,45.9 30.4,60.9 ccw(c29.4,60.9) 29.4,61.9 25.4,61.9 25.4,78.9 cw(c28.4,78.9) 28.4,81.9 87.4,81.9 cw(c87.4,78.9) 90.4,78.9 ; 90.4,29.6 90.4,80.1
Courtyard Top:
  lines w0.2: 80.5,37 81.5,37 ; 81,36.5 81,37.5 ; 74.3,33.1 87.7,33.1 87.7,39.9 74.3,39.9 74.3,33.1
  lines w0.254: 47.25,33 48,33 ; 48,32.25 48,33 ; 48,33.75 48,33 ; 48.75,33 48,33 ; 43,25.25 54,25.25 54,36.5 54,40.75 43,40.75 43,25.25

## Dimensions
25.527,30.607 to 78.105,29.083 on Courtyard Bottom
25.4,29.337 to 60.071,29.083 on Courtyard Bottom
25.4,29.591 to 41.402,29.083 on Courtyard Bottom
28.956,28.956 to 86.868,28.956 on Courtyard Bottom
28.829,77.851 to 28.956,28.956 on Courtyard Bottom
59.817,81.915 to 61.595,25.4 on Courtyard Bottom
25.527,65.913 to 90.424,61.468 on Courtyard Bottom